# EAGLE board OUT_16HP_bpb (EAGLE 6.6.0)
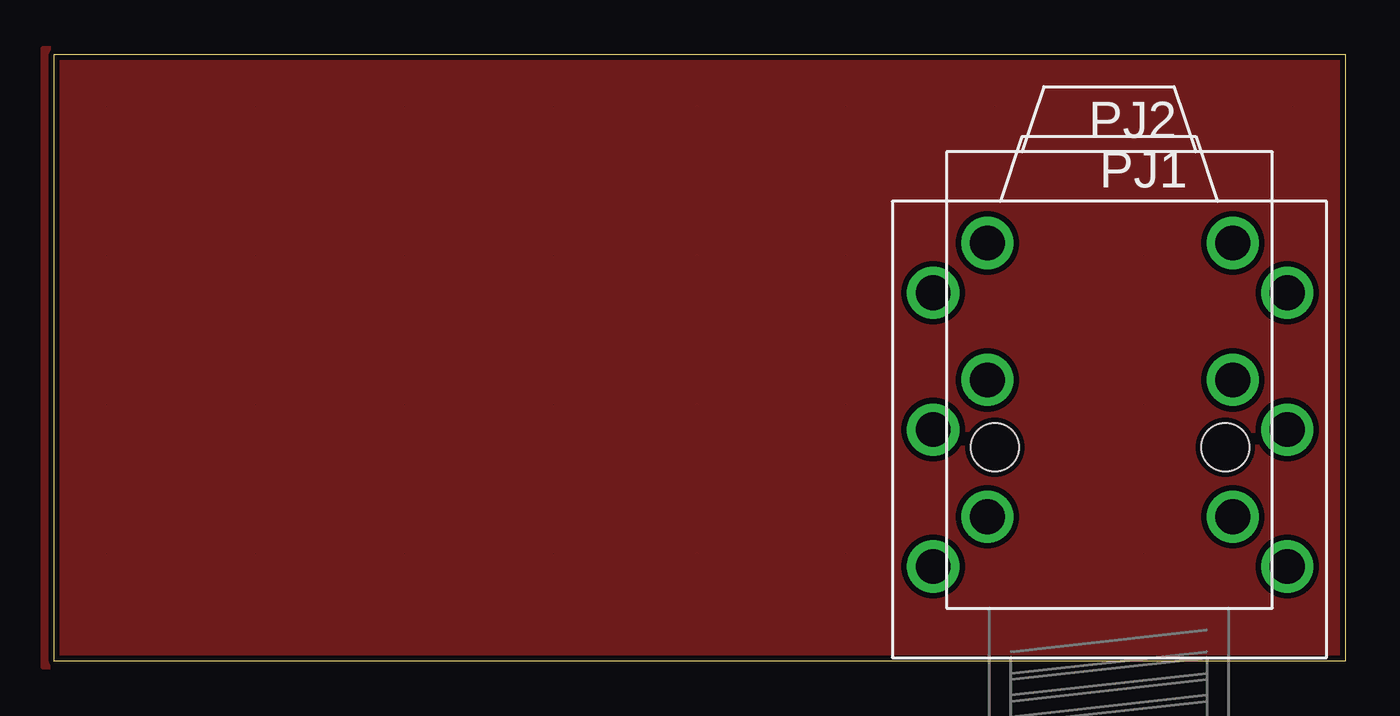
[diagram p0: board, top side]
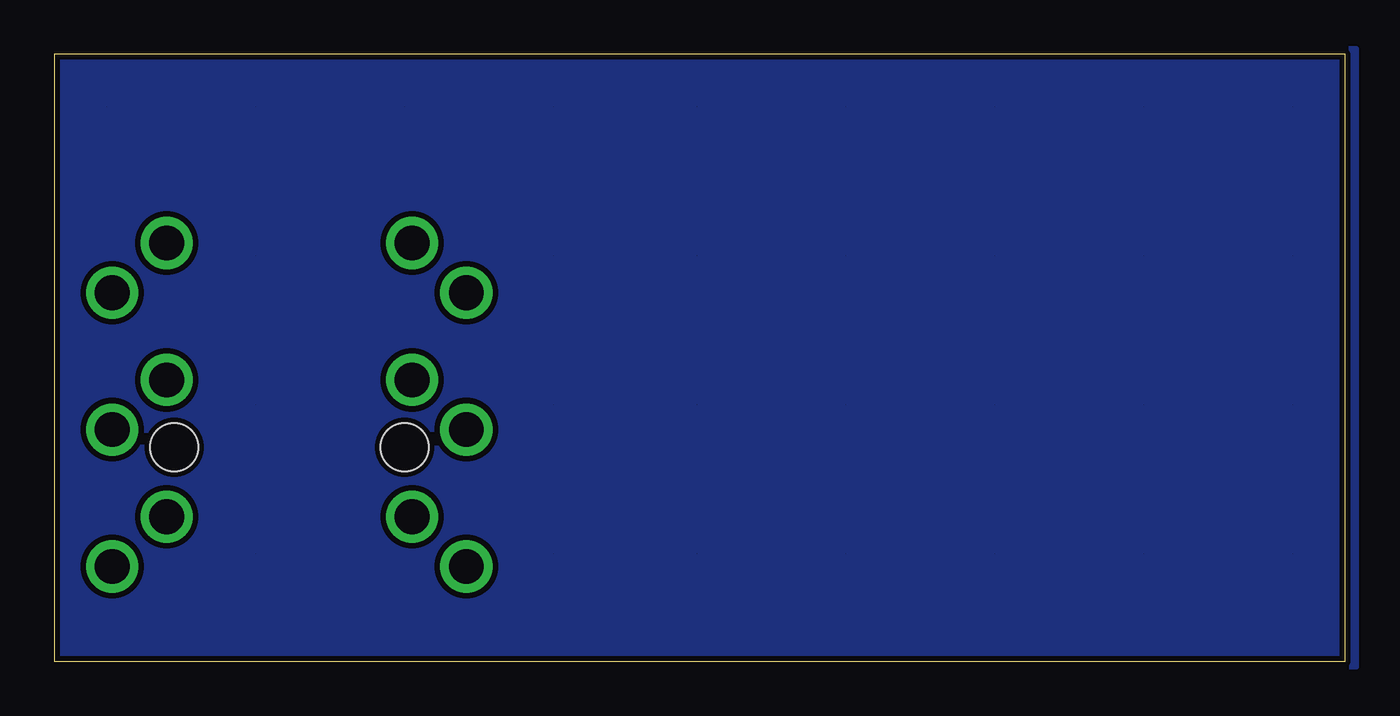
[diagram p1: board, bottom side, seen from below]

Size 59.44 x 27.94 mm. Coordinates in mm from the lower left corner, seen from the top.
Outline: 0,27.94 59.44,27.94 59.44,0 0,0 0,27.94
Copper layers (1*16): Top 0.035mm / dielectric 1.5mm / Bottom 0.035mm
Design rules "PatternAgents_7mil": minimum track width 7mil, minimum drill 14mil, track to track 7mil, track to pad 7mil, pad to pad 7mil, via to via 7mil, smd to smd 7mil, copper to edge 7mil, drill to drill 7mil, minimum pad ring 12mil, minimum via ring 10mil, stop-mask expansion 4mil, vias tented up to drill 25mil, thermal gap 7mil

## Footprints (pad centres in the part's own frame; a part is rotated, then mirrored left to right if it is on the bottom)
PJ-6_35MM-PTH-STEREO-SW = drill 1.6: RING 0,-8.25; RING-SW 0,8.05; SLEEVE -6.3,-8.25; SLEEVE-SW -6.3,8.05; TIP 6.3,-8.25; TIP-SW 6.3,8.05
PJ-611 = drill 1.6: RING 0,-5.75; RING-SW 0,5.55; SLEEVE -6.3,-5.75; SLEEVE-SW -6.3,5.55; TIP 6.3,-5.75; TIP-SW 6.3,5.55 | hole 2.2: -3.1,5.2; -3.1,-5.4

## Placement (x,y rotation side)
PJ1  JACK-6_35MM-STEREO-SW-SYNTH  [PJ-6_35MM-PTH-STEREO-SW]  48.51,10.67 90 top
PJ2  JACK-6_35MM-STEREO-SW-PJ_611  [PJ-611]  48.51,12.95 90 top

## Library data of the parts
PJ1 PJ2 = halcyonmod_Connectors

## Tracks (layer width: path | path; a pad name or v marks a point on that pad's centre or on a via)
GND
  pour Top (isolate 0.254, hatched): -0.51,28.19 59.69,28.19 59.69,-0.25 -0.51,-0.25
  pour Bottom (isolate 0.254, hatched): -0.51,28.19 59.69,28.19 59.69,-0.25 -0.51,-0.25